# EAGLE board LIDAR_Breakout (EAGLE 9.2.0)
AUTHORS: Austin Keener; REV: 1.0; TITLE: LIDAR_BREAKOUT
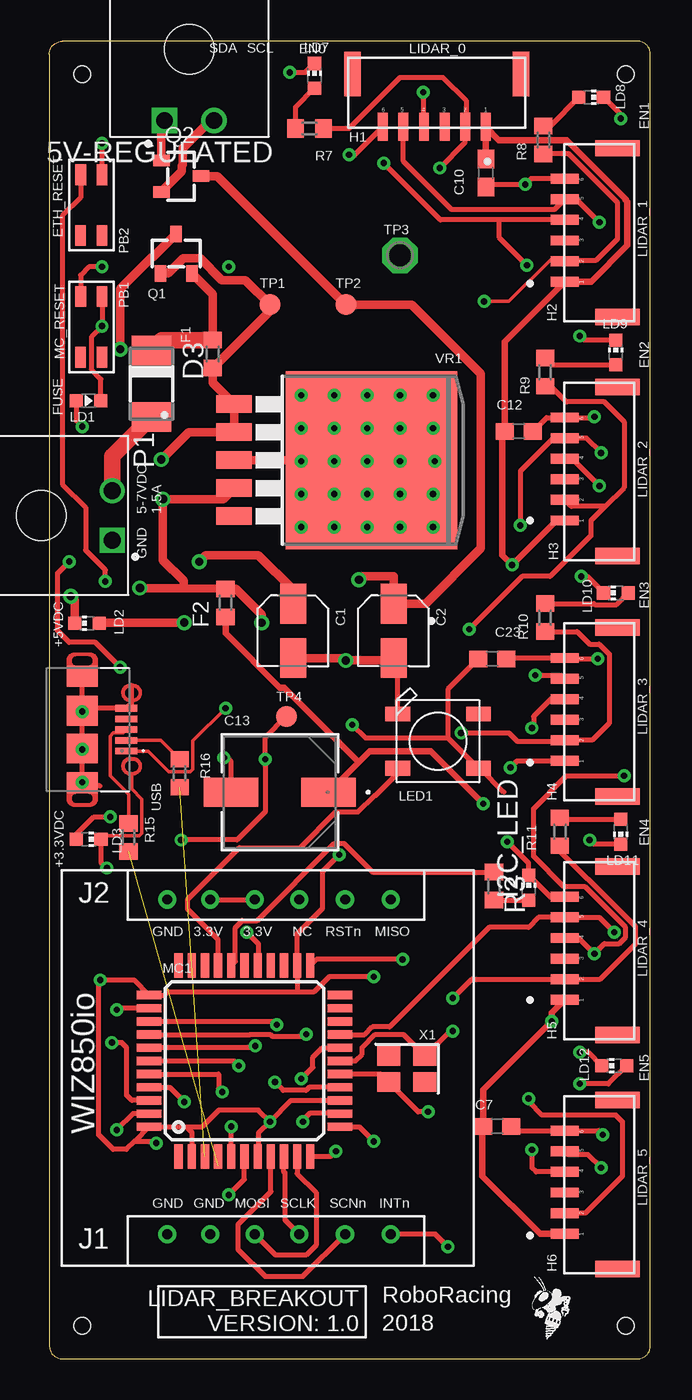
[diagram p0: board, top side]
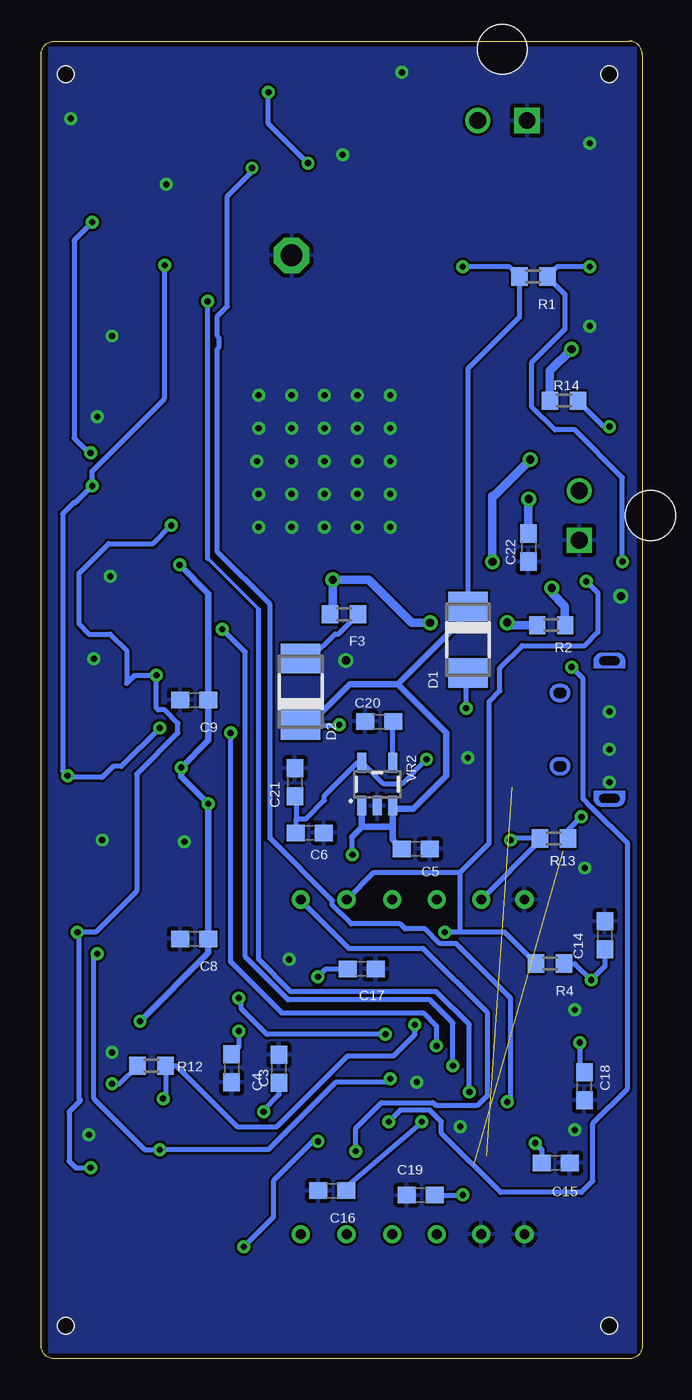
[diagram p1: board, bottom side, seen from below]

Size 36.5 x 80 mm. Coordinates in mm from the lower left corner, seen from the top.
Outline: 0.8,0 35.7,0 arc90 36.5,0.8 36.5,79.2 arc90 35.7,80 0.8,80 arc90 0,79.2 0,0.8 arc90 0.8,0
Copper layers (1*16): Top 0.0356mm / dielectric 63mil / Bottom 0.0356mm
Design rules "RJ2LayerDRU": minimum track width 6mil, minimum drill 15mil, track to track 6mil, track to pad 6mil, pad to pad 6mil, via to via 6mil, smd to smd 6mil, copper to edge 0mil, drill to drill 6mil, minimum pad ring 10mil, minimum via ring 8mil, stop-mask expansion 4mil, vias tented up to drill 0mil, thermal gap 10mil
Net classes: 0 default: width 0.203 mm; 1 diff pairs: width 0.203 mm; 2 Power: width 0.508 mm
Holes 1 mm at 35,78 2,78 2,2 35,2
tRestrict: area 6.9,14.7 to 7,15.1; area 6.8,21.1 to 7,21.4

## Footprints (pad centres in the part's own frame; a part is rotated, then mirrored left to right if it is on the bottom)
MOLEX_0436500200 = drill 1.02 square: 1 1.5,4.32 | drill 1.02: 2 -1.5,4.32 | hole 3: 0,0
CAPAE430X550N = smd 2.42 x 1.58: 1 -1.65,0; 2 1.65,0
C0603 = smd 1.1 x 1: 1 -0.85,0; 2 0.85,0
CAP_PAN_EEE_D8 = smd 3.302 x 1.778: 1 -2.959,0; 2 2.959,0
DO-214AC = smd 1.8 x 2.4: A 2.025,0; C -2.025,0
WIZ850IO = drill 0.6: 1 6.4,1.9; 2 9.02,1.9; 3 11.72,1.9; 4 14.42,1.9; 5 17.2,1.9; 6 19.98,1.9; 7 6.4,22.22; 8 9.02,22.22; 9 11.72,22.22; 10 14.42,22.22; 11 17.2,22.22; 12 19.98,22.22
F0603 = smd 1 x 1.1: 1 -0.85,0; 2 0.85,0
SM06B-GHS = smd 1 x 2.7: P$1 0.25,1; P$2 10.5,1 | smd 0.6 x 1.7: P$3 2.4,4.2; P$4 3.65,4.2; P$5 4.9,4.2; P$6 6.15,4.2; P$7 7.4,4.2; P$8 8.65,4.2
CHIP-LED0603 = smd 0.8 x 0.8: A 0,-0.75; C 0,0.75
WS2812B = smd 1.5 x 0.9: 1-VDD 2.45,-1.65; 2-DOUT 2.45,1.65; 3-GND -2.45,1.65; 4-DIN -2.45,-1.65
TQFP44 = smd 1.5 x 0.5: 1 -5.8,4; 2 -5.8,3.2; 3 -5.8,2.4; 4 -5.8,1.6; 5 -5.8,0.8; 6 -5.8,0; 7 -5.8,-0.8; 8 -5.8,-1.6; 9 -5.8,-2.4; 10 -5.8,-3.2; 11 -5.8,-4; 23 5.8,-4; 24 5.8,-3.2; 25 5.8,-2.4; 26 5.8,-1.6; 27 5.8,-0.8; 28 5.8,0; 29 5.8,0.8; 30 5.8,1.6; 31 5.8,2.4; 32 5.8,3.2; 33 5.8,4 | smd 0.5 x 1.5: 12 -4,-5.8; 13 -3.2,-5.8; 14 -2.4,-5.8; 15 -1.6,-5.8; 16 -0.8,-5.8; 17 0,-5.8; 18 0.8,-5.8; 19 1.6,-5.8; 20 2.4,-5.8; 21 3.2,-5.8; 22 4,-5.8; 34 4,5.8; 35 3.2,5.8; 36 2.4,5.8; 37 1.6,5.8; 38 0.8,5.8; 39 0,5.8; 40 -0.8,5.8; 41 -1.6,5.8; 42 -2.4,5.8; 43 -3.2,5.8; 44 -4,5.8
RESET_PB_RA = smd 1.27 x 0.66: P$1 0.9,0.7; P$3 0.9,2 | smd 1.27 x 0.635: P$2 4.6,0.7; P$4 4.6,2
SOT-23-3 = smd 0.7 x 1: 1 -0.95,-1.2; 2 0.95,-1.2; 3 0,1.2
R0603 = smd 1 x 1.1: 1 -0.85,0; 2 0.85,0
B1,27 = smd 1.27 x 1.27: TP 0,0
P1-13 = drill 1.321 pad 2.159 octagon: TP 0,0
MOLEX_47589-0001 = smd 1.35 x 0.4: 1 2.675,-1.3; 2 2.675,-0.65; 3 2.675,0; 4 2.675,0.65; 5 2.675,1.3 | smd 0.01 x 0.01: P$1 3,2.675; P$2 3,-2.675 | smd 1.9 x 1.275: P$3 0,3.237; P$6 0,-3.237 | smd 1.9 x 1.8: P$4 0,1.15; P$5 0,-1.15
TO263-5 = smd 1.067 x 2.159: 1 -3.404,-5.791; 2 -1.702,-5.791; 3 0,-5.791; 4 1.702,-5.791; 5 3.404,-5.791 | smd 10.8 x 10.41: 6 0,2.54
SOT23-5 = smd 0.55 x 1.2: 1 -0.95,-1.3; 2 0,-1.3; 3 0.95,-1.3; 4 0.95,1.3; 5 -0.95,1.3
XTAL-3.2X2.5 = smd 1.4 x 1.2: 1 -1.1,-0.8; 2 1.1,-0.8; 3 1.1,0.8; 4 -1.1,0.8

## Placement (x,y rotation side)
5V-REGULATED  [MOLEX_0436500200]  8.5,79.5 180 top
C1  10 uF  [CAPAE430X550N]  14.8,44.2 270 top
C2  10 uF  [CAPAE430X550N]  20.9,44.2 270 top
C3  22 pF  [C0603]  24.93,17.65 270 bottom
C4  22 pF  [C0603]  22.07,17.62 90 bottom
C5  1 uF  [C0603]  13.75,30.96 0 bottom
C6  2.2 uF  [C0603]  20.2,31.93 0 bottom
C7  0.1 uF  [C0603]  27.2,14.1 0 top
C8  0.1 uF  [C0603]  27.2,25.5 180 bottom
C9  0.1 uF  [C0603]  27.2,40 180 bottom
C10  0.1 uF  [C0603]  26.5,72 270 top
C12  0.1 uF  [C0603]  28.5,56.3 0 top
C13  680 uF  [CAP_PAN_EEE_D8]  14,34.4 180 top
C14  0.1 uF  [C0603]  2.27,25.73 90 bottom
C15  0.1 uF  [C0603]  5.25,11.89 0 bottom
C16  0.1 uF  [C0603]  18.83,10.21 180 bottom
C17  0.1 uF  [C0603]  17.05,23.68 0 bottom
C18  10 nF  [C0603]  3.52,16.54 270 bottom
C19  1 uF  [C0603]  13.46,9.95 180 bottom
C20  470 pF  [C0603]  15.97,38.7 180 bottom
C21  0.1 uF  [C0603]  21.09,35.01 90 bottom
C22  0.1 uF  [C0603]  6.92,49.26 270 bottom
C23  1 uF  [C0603]  26.9,42.5 0 top
D1  [DO-214AC]  10.59,43.66 270 bottom
D2  [DO-214AC]  20.75,40.5 90 bottom
D3  [DO-214AC]  6.2,59.2 270 top
ETH1  WIZ850IO  [WIZ850IO]  0.76,5.66 0 top
F1  1.5 A  [F0603]  9.93,61 270 top
F2  1A  [F0603]  10.7,45.9 90 top
F3  1A  [F0603]  18.1,45.2 180 bottom
H1  SM06B-GHS  [SM06B-GHS]  28.9,79 180 top
H2  SM06B-GHS  [SM06B-GHS]  35.5,63 90 top
H3  SM06B-GHS  [SM06B-GHS]  35.5,48.5 90 top
H4  SM06B-GHS  [SM06B-GHS]  35.5,33.9 90 top
H5  SM06B-GHS  [SM06B-GHS]  35.5,19.4 90 top
H6  SM06B-GHS  [SM06B-GHS]  35.5,5.2 90 top
I2C_LED  YELLOW  [CHIP-LED0603]  29.1,28.6 0 top
LD1  RED  [CHIP-LED0603]  2.38,58.17 270 top
LD2  GREEN  [CHIP-LED0603]  2.29,44.65 90 top
LD3  GREEN  [CHIP-LED0603]  2.39,31.55 270 top
LD7  BLUE  [CHIP-LED0603]  16.1,77.9 0 top
LD8  BLUE  [CHIP-LED0603]  32.9,76.6 270 top
LD9  BLUE  [CHIP-LED0603]  34.4,61.1 0 top
LD10  BLUE  [CHIP-LED0603]  34.4,46.5 90 top
LD11  BLUE  [CHIP-LED0603]  34.7,32 180 top
LD12  BLUE  [CHIP-LED0603]  34.3,17.8 90 top
LED1  WS2812B5050  [WS2812B]  23.6,37.5 0 top
MC1  ATMEGA32U4-AU  [TQFP44]  11.85,18.09 90 top
P1  [MOLEX_0436500200]  -0.49,51.2 270 top
PB1  ATMEGA_RESET  [RESET_PB_RA]  1.2,65.4 270 top
PB2  ETH_RESET  [RESET_PB_RA]  1.2,72.8 270 top
Q1  [SOT-23-3]  7.7,67.1 0 top
Q2  [SOT-23-3]  8,71.8 270 top
R1  10 kΩ  [R0603]  6.62,65.71 0 bottom
R2  1 kΩ  [R0603]  5.53,44.55 0 bottom
R3  1 kΩ  [R0603]  27,28.7 270 top
R4  10 kΩ  [R0603]  5.6,24 180 bottom
R7  1 kΩ  [R0603]  15.8,74.7 180 top
R8  1 kΩ  [R0603]  30,74 90 top
R9  1 kΩ  [R0603]  30.1,59.9 90 top
R10  1 kΩ  [R0603]  30.1,45 90 top
R11  1 kΩ  [R0603]  31,32 90 top
R12  1 kΩ  [R0603]  29.8,17.8 180 bottom
R13  1 kΩ  [R0603]  5.37,31.59 180 bottom
R14  1 kΩ  [R0603]  4.76,58.18 0 bottom
R15  22 Ω  [R0603]  4.81,31.66 90 top
R16  22 Ω  [R0603]  7.91,35.55 90 top
TP1  PTR1B1,27  [B1,27]  13.4,64 0 top
TP2  PTR1B1,27  [B1,27]  18,64 0 top
TP3  PTR1PAD1-13  [P1-13]  21.3,67 0 top
TP4  PTR1B1,27  [B1,27]  14.4,39 0 top
U$3  ROBOBUZZ0.2X  [ROBOBUZZ_0.2X]  30.2,1.2 0 top
USB  [MOLEX_47589-0001]  2,38.2 0 top
VR1  LP3852EMP-5.0  [TO263-5]  17.01,54.56 270 top
VR2  MIC5219 3.3V  [SOT23-5]  16.1,34.89 0 bottom
X1  [XTAL-3.2X2.5]  21.7,17.6 180 top

## Library data of the parts
5V-REGULATED P1 = 0436500200; DESCRIPTION: Conn Power HDR 2 POS 3mm Solder RA Thru-Hole 2 Terminal 1 Port Micro-Fit 3.0Ã¢âÂ¢ Tray; MF: Molex, LLC; MP: 0436500200; PACKAGE: None
C1 C2 = EEE-1CA100SR; DESCRIPTION: Capacitor Alum Elec, 10uf, 16v, 20%, Scapacitor Alum Elec, 10uf, 16v, 20%, Smd, Full Reel; DIGI-KEY_PART_NUMBER: PCE3878CT-ND; DIGI-KEY_PURCHASE_URL: https://www.digikey.com/product-detail/en/panasonic-electronic-components/EEE-1CA100SR/PCE3878CT-ND/766254?utm_source=snapeda&utm_medium=aggregator&utm_campaign=symbol; MF: Panasonic; MP: EEE-1CA100SR; PACKAGE: Radial Panasonic
C3-C10 C12 C14-C22 = resistor
C13 = 680uF_Elect_Cap; MANUFACTURER_PART_NUMBER: EEEFTJ681XAP; VENDOR: Panasonic
C23 = rcl; SPICEPREFIX: C
D1-D3 = RoboJackets-Diodes
ETH1 = WIZ850io
F1-F3 = RoboJackets-Fuses
H1-H6 = RoboJackets-Connectors
I2C_LED LD2 LD3 LD7-LD12 = led
LD1 = RoboJackets-LEDs; DIGIKEY: 160-1447-1-ND; MPN: LTST-C191KRKT
LED1 MC1 = adafruit
PB1 PB2 = RoboJackets-Switches
Q1 Q2 = RoboJackets-Discrete
R1-R4 R7-R16 = rcl; SPICEPREFIX: R
TP1-TP4 = testpad
U$3 = RoboJackets-Aesthetics
USB = 47589-0001; DESCRIPTION: Stainless Steel Extractor for Camera Socket, 6.5x6.5 Type, Lead free; MF: Molex; MP: 47589-0001; PACKAGE: None
VR1 = linear
VR2 = SparkFun-IC-Power; PROD_ID: VREG-09872
X1 = RoboJackets-FreqGen

## Nets
+3.3V: C6.1 C21.1 ETH1.8 ETH1.9 R13.2 TP4.TP VR2.5
AREF: C18.1 MC1.42
GND: 5V-REGULATED.1 C1.2 C2.2 C3.2 C4.2 C5.2 C6.2 C7.2 C8.2 C9.2 C10.2 C12.2 C13.2 C14.2 C15.2 C16.2 C17.2 C18.2 C19.2 C20.2 C21.2 C22.2 C23.2 ETH1.1 ETH1.2 ETH1.7 H1.P$8 H2.P$8 H3.P$8 H4.P$8 H5.P$8 H6.P$8 I2C_LED.C LD1.C LD2.C LD3.C LD7.C LD8.C LD9.C LD10.C LD11.C LD12.C LED1.3-GND MC1.5 MC1.15 MC1.23 MC1.35 MC1.43 P1.1 PB1.P$3 PB2.P$3 Q2.1 TP3.TP USB.5 USB.P$1 USB.P$2 USB.P$3 USB.P$4 USB.P$5 USB.P$6 VR1.3 VR1.6 VR2.2
I2C_ACTIVITY: MC1.29 R3.1
INTN_ETH: ETH1.6 MC1.12
LDR0_EN: H1.P$4 MC1.41 R7.1
LDR0_LED: LD7.A R7.2
LDR1_EN: H2.P$4 MC1.40 R8.1
LDR1_LED: LD8.A R8.2
LDR2_EN: H3.P$4 MC1.39 R9.1
LDR2_LED: LD9.A R9.2
LDR3_EN: H4.P$4 MC1.38 R10.1
LDR3_LED: LD10.A R10.2
LDR4_EN: H5.P$4 MC1.37 R11.1
LDR4_LED: LD11.A R11.2
LDR5_EN: H6.P$4 MC1.36 R12.1
LDR5_LED: LD12.A R12.2
MISO_ETH: ETH1.12 MC1.11
MOSI_ETH: ETH1.3 MC1.10
N$1: D1.A USB.1
N$2: D3.A P1.2
N$3: LD2.A R2.1
N$4: Q1.3 R14.1
N$5: LD3.A R13.1
N$6: LD1.A R14.2
N$7: D2.A F3.1
N$8: I2C_LED.A R3.2
N$9: 5V-REGULATED.2 Q2.2
N$14: R16.2 USB.2
N$23: R15.2 USB.3
N$31: C20.1 VR2.4
RST_ETH: ETH1.11 MC1.27 PB2.P$1 R4.2
RST_MC: MC1.13 PB1.P$1 R1.2
SCL_LIDAR: H1.P$6 H2.P$6 H3.P$6 H4.P$6 H5.P$6 H6.P$6 MC1.18
SCLK_ETH: ETH1.4 MC1.9
SCNN_ETH: ETH1.5 MC1.8
SDA_LIDAR: H1.P$7 H2.P$7 H3.P$7 H4.P$7 H5.P$7 H6.P$7 MC1.19
STATUS_PWM: LED1.4-DIN MC1.30
UCAP: C19.1 MC1.6
USB_N [diff pairs]: MC1.3 R16.1
USB_P [diff pairs]: MC1.4 R15.1
UVCC: D3.C F1.1 Q1.2
VCC_1: C7.1 C8.1 C9.1 C10.1 C12.1 C13.1 F2.1 H1.P$3 H2.P$3 H3.P$3 H4.P$3 H5.P$3 H6.P$3
VCC_2: C5.1 C14.1 C15.1 C16.1 C17.1 C23.1 D1.C D2.C LED1.1-VDD MC1.2 MC1.7 MC1.14 MC1.24 MC1.34 MC1.44 R1.1 R4.1 VR2.1 VR2.3
VIN: C1.1 F1.2 Q1.1 TP1.TP VR1.1 VR1.2
VOUT: C2.1 C22.1 F2.2 F3.2 Q2.3 R2.2 TP2.TP VR1.4
XTAL1: C3.1 MC1.17 X1.1
XTAL2: C4.1 MC1.16 X1.3

## Tracks (layer width: path | path; a pad name or v marks a point on that pad's centre or on a via)
+3.3V  (via drill 0.38)
  Top 0.305: TP4.TP 13.11,37.71 v13.11,36.41 13.11,33.21 11.4,31.5 v8,31.5 | ETH1.8 ETH1.9
  Bottom 0.305: v8,31.5 7.91,31.59 R13.2 6.22,31.44 ETH1.8 | v13.11,36.41 14.61,34.9 15.7,34.9 16.99,36.19 VR2.5 17.31,36.19 19.3,34.2 19.3,33.9 20.4,32.8 21,32.8 | C6.1 21,31.98 21,32.8 | C21.1 21,34.07 21,32.8
AREF  (via drill 0.38)
  Top 0.305: MC1.42 5.01,15.69 4.7,16 4.7,18.9 4.4,19.2 v3.8,19.2
  Bottom 0.305: v3.8,19.2 3.8,17.67 C18.1
GND  (via drill 0.38, 0.5)
  Top 0.203: VR1.3 11.09,54.7 | USB.P$2 5,34.6 5.61,33.99 5.61,31.91 5.46,31.76 3.35,31.76 LD3.C
  Top 0.305: LD12.C 32.75,18.6 v32.2,18.6 | MC1.35 4.19,21.29 v4.1,21.2 | MC1.43 5.09,14.89 v4.1,13.9 | v21.45,24.25 16.21,24.25 MC1.23 | MC1.5 v11.05,14.1 | C1.2 14.95,42.4 | C2.2 20.75,42.4 21.15,42 LED1.3-GND | H2.P$8 29.25,71.65 v28.9,71.3 26.65,71.3 C10.2 | 31.35,42.5 H4.P$8 27.8,42.55 C23.2 | 31.35,42.5 v33.3,42.5 | v33.6,13.6 33.35,13.85 H6.P$8 28.3,13.85 C7.2 | LD10.C 32.65,47.5 v32.3,47.5 | v33.1,57.2 33.05,57.15 H3.P$8 30.2,57.15 C12.2 | PB1.P$3 v3.2,62.7 2.58,62.08 2.58,60.04 3.13,59.49 LD1.C | PB2.P$3 v3.2,73.8 | H1.P$8 18.55,73.1 v18.2,73.1 | LD3.C 3.14,30.16 v3.5,29.8 | 2,39.6 USB.P$4 v2,39.3 USB.P$5 v2,37 v2,35 USB.P$6 2.18,34.78 3.08,34.78 | 2,39.6 USB.P$3 | C13.2 11.04,36.26 10.8,36.5 v10.6,36.5 | VR1.6 19.36,54.56 v19.3,54.5 | MC1.15 15.77,16.49 15.59,16.3 14.2,16.3 v13.7,16.8 | 2,39.6 2.1,39.5 USB.5 5,39.83 USB.P$1 | 30.6,42.5 31.35,42.5 | v14.6,78.1 15.55,78.1 LD7.C | LD8.C 34.7,75.55 v34.7,75.3 | LD9.C 32.45,61.85 v32.2,62.1 | LD11.C 33.05,31.25 v32.8,31.5 | H5.P$8 30.4,28.05 I2C_LED.C 29.1,30.1 v27.8,31.4
  Top 0.508: 20.75,42.4 v18,42.4 17.85,42.55 C1.2 | LD2.C 1.54,46.06 v1.3,46.3 | VR1.3 VR1.6 | Q2.1 6.8,74.98
  Top 1.016: 6.8,74.98 5V-REGULATED.1
  other vias: 15.3,58.5 17.3,58.5 19.3,58.5 21.3,58.5 15.3,56.5 15.3,54.5 15.3,52.5 15.3,50.5 17.3,50.5 17.3,52.5 17.3,54.5 21.3,54.5 23.4,54.5 19.3,52.5 21.3,52.5 23.3,52.5 17.3,56.5 19.3,56.5 21.3,56.5 23.3,56.5 23.3,58.5 19.3,50.5 21.3,50.5 23.3,50.5
  pour Bottom: 0.4,0.4 0.4,79.6 36,79.6 36,0.4
I2C_ACTIVITY
  Top 0.305: MC1.29 11.29,24.13 11.29,26.18 11.71,26.6 12.61,26.6 17.31,31.3 17.89,31.3 19.64,29.55 R3.1
INTN_ETH  (via drill 0.38)
  Top 0.305: MC1.12 18.81,14.09 v19.7,13.2 | v24.2,6.8 23.44,7.56 ETH1.6
  Bottom 0.305: v19.7,13.2 20,13.2 22.4,10.8 22.4,8.6 v24.2,6.8
LDR0_EN  (via drill 0.38)
  Top 0.305: MC1.41 7.31,16.49 v8.2,15.6 | R7.1 18.2,74.7 21.3,77.8 23.9,77.8 25.3,76.4 25.3,74.75 H1.P$4 25.25,73.85 v23.7,72.3
  Bottom 0.305: v8.2,15.6 8,15.8 8,21.9 11.3,25.2 12.29,25.2 13.19,26.1 14.4,26.1 14.7,26.4 17.69,26.4 18.82,27.53 18.82,27.82 22.6,31.6 22.6,45.8 25.8,49 25.8,61.31 25.7,61.41 25.7,61.99 25.8,62.09 25.8,63.3 25.2,63.9 25.2,70.6 23.7,72.1 v23.7,72.3
LDR0_LED
  Top 0.305: R7.2 14.95,76 LD7.A
LDR1_EN  (via drill 0.38)
  Top 0.203: v26.4,64.2 27.9,64.2 30.4,66.7 31.35,66.7
  Top 0.305: MC1.40 10.29,17.29 10.29,16.41 v10.5,16.2 | H2.P$4 31.35,66.7 33.2,66.7 34.5,68 34.5,70.2 31.55,73.15 R8.1
  Bottom 0.203: 23.3,45.5 26.4,48.6
  Bottom 0.305: v10.5,16.2 10.5,20.3 12.5,22.3 21.35,22.3 23.3,24.25 23.3,45.5 | 26.4,48.6 v26.4,64.2
LDR1_LED
  Top 0.305: LD8.A 30.4,74.85 R8.2
LDR2_EN  (via drill 0.38)
  Top 0.305: v11.5,17.8 11.21,18.09 MC1.39 | v25.5,44.3 28.7,47.5 30.4,47.5 32.9,50 32.9,50.9 33.75,51.75 | 33.75,51.75 31.7,51.75 H3.P$4 | 33.75,51.75 34.9,52.9 34.9,56.9 33.7,58.1 31.4,58.1 30.45,59.05 R9.1
  Bottom 0.305: v11.5,17.8 11.5,20.4 12.9,21.8 21.5,21.8 24.1,24.4 24.1,42.9 v25.5,44.3
LDR2_LED
  Top 0.305: R9.2 30.5,60.35 LD9.A
LDR3_EN  (via drill 0.38)
  Top 0.305: v12.5,19 12.39,18.89 MC1.38 | R10.1 32.05,44.15 32.8,43.4 33.39,43.4 34,42.79 34,38.6 33,37.6 31.35,37.6 H4.P$4 31.25,37.5 28.4,37.5 27.9,38 v25,38
  Bottom 0.305: v25,38 25,24.1 21.9,21 13.3,21 12.5,20.2 v12.5,19
LDR3_LED
  Top 0.305: R10.2 33.07,45.85 33.12,45.8 34.45,45.8 LD10.A
LDR4_EN  (via drill 0.38)
  Top 0.305: v24.5,21.9 25.65,23.05 H5.P$4 33.45,23.05 35.6,25.2 35.6,26.23 32.72,29.11 32.7,29.11 31,30.81 R11.1 | MC1.37 12.2,19.69 12.21,19.7 13.41,19.7 13.53,19.59 15.49,19.59 v15.6,19.7
  Bottom 0.305: v15.6,19.7 22.8,19.7 24.35,21.25 24.35,21.75 v24.5,21.9
LDR4_LED
  Top 0.305: R11.2 31.1,32.75 LD11.A
LDR5_EN  (via drill 0.38)
  Top 0.305: v13.81,20.29 13.61,20.49 MC1.36 | H6.P$4 32.55,8.85 34.8,11.1 34.8,14.4 34.4,14.8 29.9,14.8 29.1,15.6 v29.1,15.8
  Bottom 0.305: v29.1,15.8 28.95,15.95 R12.1 28.3,17.8 24.6,14.1 22.2,14.1 17.9,18.4 15.1,18.4 13.81,19.69 v13.81,20.29
LDR5_LED  (via drill 0.38)
  Top 0.305: v32.2,16.7 33.95,16.7 LD12.A
  Bottom 0.305: R12.2 31.75,16.7 v32.2,16.7
MISO_ETH  (via drill 0.38)
  Top 0.305: MC1.11 17.09,12.29 v17.4,12.6
  Bottom 0.305: v17.4,12.6 17.4,14 15.84,15.56 12.71,15.56 12.55,15.4 10,15.4 9.4,16 9.4,21 13.3,24.9 17.8,24.9 20.74,27.84 ETH1.12
MOSI_ETH
  Top 0.305: ETH1.3 13.74,6.3 15.6,6.3 16.2,6.9 16.2,10.1 15.05,11.25 MC1.10
N$1  (via drill 0.38)
  Top 0.203: v10.7,39.5 8.71,37.51 8.71,35.8 8.56,35.65 7.25,35.65 6,36.9 USB.1
  Bottom 0.305: v10.7,39.5 10.7,41.52 D1.A
N$2
  Top 1.016: P1.2 3.83,54.8 D3.A
N$3  (via drill 0.5)
  Top 0.508: v8.2,44.7 3.09,44.7 LD2.A
  Bottom 0.508: R2.1 8.05,44.55 v8.2,44.7
N$4  (via drill 0.5)
  Top 0.508: v4.3,61.3 4.3,64.97 6.21,66.87 6.27,66.87 Q1.3
  Bottom 0.508: v4.3,61.3 5.61,59.99 R14.1
N$5  (via drill 0.38)
  Top 0.305: LD3.A 1.64,31.84 2.7,32.9 v3.7,32.9
  Bottom 0.305: v3.7,32.9 4.52,32.08 R13.1
N$6  (via drill 0.38)
  Top 0.305: LD1.A 1.63,56.97 v2,56.6
  Bottom 0.305: v2,56.6 2.33,56.6 R14.2
N$7
  Bottom 0.305: D2.A 20.15,42.52 18.68,44 18.45,44 F3.1
N$8
  Top 0.305: R3.2 I2C_LED.A
N$9
  Top 0.508: Q2.2 8.04,72.09 8.04,72.42 8.1,72.48 8.1,73.5 9.78,75.18
  Top 1.016: 9.78,75.18 5V-REGULATED.2
N$14
  Top 0.203: R16.2 6.76,37.55 USB.2
N$23
  Top 0.203: R15.2 4.81,34.29 3.7,35.4 3.7,37.81 3.9,38 4.48,38 USB.3
N$31
  Bottom 0.305: VR2.4 15.15,38.67 C20.1
RST_ETH  (via drill 0.38)
  Top 0.305: v12,25.9 12.7,25.2 12.7,23.94 MC1.27 | PB2.P$1 1.9,70.5 0.8,69.4 0.8,53.1 2.2,51.7 2.2,49.1 3.4,47.9 v3.4,47.2
  Bottom 0.305: R4.2 8.35,25.9 11.1,25.9 | 11.1,25.9 v12,25.9 | v3.4,47.2 2.7,46.5 2.7,44.1 3.5,43.3 7.3,43.3 8.65,41.95 8.65,40.55 9.3,39.9 9.3,31.3 11.1,29.5 | ETH1.11 16.34,29.5 11.1,29.5 | 11.1,29.5 11.1,25.9
RST_MC  (via drill 0.38)
  Top 0.305: v3.2,66.3 2.4,66.3 1.9,65.8 PB1.P$1 | MC1.13 17.64,14.9 15.8,14.9 15.4,14.5 v15.4,14.4 | v1.21,48.41 0.5,47.7 0.5,44.2 1.2,43.5 2.8,43.5 v4.3,42
  Bottom 0.305: v3.2,66.3 5.18,66.3 R1.2 4.7,64.64 4.7,62.5 6.7,60.5 6.7,57.79 5.31,56.4 4.1,56.4 1.21,53.51 v1.21,48.41 | v4.3,42 3.6,41.3 3.6,34 3.07,33.47 3.06,33.46 0.9,31.3 0.9,16.4 3,14.3 3,10.8 3.7,10.1 8.6,10.1 12.2,13.7 12.2,14.4 12.9,15.1 14.7,15.1 v15.4,14.4
SCL_LIDAR  (via drill 0.38)
  Top 0.305: v20.3,72.6 23.75,69.15 27.3,69.15 | v22.7,76.9 22.7,74.85 H1.P$6 | v29.3,38.3 29.4,38.4 29.4,39 30.45,40.05 H4.P$6 | v15.3,17 16,17.7 16,18.3 16.59,18.89 MC1.18 | H6.P$6 29.55,11.35 29.3,11.6 v29.3,12.7 | H2.P$6 27.3,69.15 | 27.3,69.15 27.3,68.1 v29,66.4 | v33.4,53 31.75,54.65 H3.P$6 | H5.P$6 32.15,25.55 v33.1,24.6 33.7,25.2 34.59,25.2 35,25.61 35,26.19 32.53,28.66 31.25,28.66 29.4,30.5 29.4,33.4 31.4,35.4 v34.9,35.4
  Bottom 0.305: v20.3,72.6 22.7,75 v22.7,76.9 | v15.3,17 15.3,16.8 18.6,16.8 22.7,12.7 v29.3,12.7 30.2,12.7 33.3,15.8 33.3,24.4 v33.1,24.6 | v29,66.4 29,58.3 33.4,53.9 v33.4,53 34.4,52 34.5,52 35.2,51.3 35.2,35.7 v34.9,35.4 34.8,35.3 32.8,35.3 32.12,35.98 31.62,35.98 v29.3,38.3
SCLK_ETH
  Top 0.305: MC1.9 14.25,11.35 14.3,11.3 14.3,8.44 ETH1.4
SCNN_ETH
  Top 0.305: MC1.8 13.45,10.15 11.45,8.15 11.45,6.65 13.1,5 15.39,5 ETH1.5
SDA_LIDAR  (via drill 0.38)
  Top 0.305: v29.5,41.5 31.1,41.5 H4.P$7 | 21.5,75.4 H1.P$7 21.5,72.7 24.4,69.8 30.7,69.8 H2.P$7 32,70.4 v33.4,69 | v33.5,11.6 32.7,12.4 31.5,12.4 H6.P$7 | v28.6,50.6 28.6,53.9 30.6,55.9 H3.P$7 32.6,55.9 v33.5,55 | MC1.19 19.14,19.69 19.61,20.16 20.66,20.16 26.7,26.2 29.1,26.2 29.7,26.8 H5.P$7 33.4,26.8 v34.3,25.9
  Bottom 0.305: v33.5,11.6 34.4,11.6 34.8,12 34.8,15 34.1,15.7 34.2,15.8 34.2,25.8 | v33.4,69 34.5,67.9 34.5,55.9 33.6,55 v33.5,55 | v28.6,50.6 29.7,49.5 32.4,49.5 34.2,47.7 34.2,44.6 33.6,44 32.3,44 31.31,43.01 31.31,41.01 30.83,41.5 v29.5,41.5 29.5,39.5 29.4,39.4 29,39.4 28.2,38.6 28.2,38 30.7,35.5 30.7,28.4 33.2,25.9 34.1,25.9 34.2,25.8 | 34.2,25.8 v34.3,25.9
STATUS_PWM
  Top 0.305: MC1.30 10.25,25.45 8.4,27.3 8.4,27.9 11.54,31.04 15.24,31.04 17.41,33.21 18.74,33.21 19.73,34.2 19.8,34.2 21.15,35.55 LED1.4-DIN
UCAP  (via drill 0.38)
  Top 0.305: v10.9,9.95 11.85,10.9 MC1.6
  Bottom 0.305: C19.1 v10.9,9.95
USB_N  (1 unrouted)
USB_P  (1 unrouted)
  Top 0.203: 4.82,30.83 R15.1 | 10.25,11.73 MC1.4
UVCC
  Top 0.508: F1.1 9.93,64.62 Q1.2
  Top 1.016: F1.1 6.83,61.85 D3.C
VCC_1  (via drill 0.38)
  Top 0.305: v28,35.9 28.4,36.3 H4.P$3 | 26.3,14.05 C7.1 | 30.8,50.9 H3.P$3 | 27.5,56.15 C12.1
  Top 0.406: v26.35,33.7 23.15,36.9 19.46,36.9 18.78,36.22 | C13.1 18.78,36.22 | 18.78,36.22 14.25,40.75 14,40.75 10.7,44.05 F2.1 | H5.P$3 30.5,21 v30.5,20.5 26.35,16.35 C7.1 | H6.P$3 29.8,7.6 26.3,11.1 26.3,14.05 | 30.8,50.9 v28.1,48.2 27.5,48.8 27.5,56.15 | C12.1 27.65,61.75 H2.P$3 32.9,65.4 35.1,67.6 35.1,70.25 35.01,70.34 35.01,70.41 31.42,74 27.3,74 H1.P$3 C10.1
  Bottom 0.406: v30.5,20.5 26.35,24.65 C8.1 v26.35,33.7 28,35.35 v28,35.9 26.35,37.55 C9.1 26.35,46.45 v28.1,48.2
VCC_2  (via drill 0.38)
  Top 0.305: 8.31,14.09 MC1.44 5.18,13.22 | 8.31,14.09 8.65,13.75 MC1.2 | MC1.7 12.7,12.34 12.7,13.7 v13.4,14.4 | v13.4,14.4 14.69,15.69 MC1.14 | v19.7,23.2 17,23.2 16.1,22.3 15.1,22.3 | 8.31,14.09 9.29,14.09 10.3,15.1 12.7,15.1 v13.4,14.4 | 15.1,22.3 15.05,22.35 MC1.24 15.05,25.8 16.6,27.35 16.6,29.6 v17.6,30.6 | 15.1,22.3 7.2,22.3 6.99,22.09 MC1.34 5.13,23 v3.1,23 3,22.9 3,13.6 3.88,12.72 4.68,12.72 5.18,13.22 | v18.4,38.5 19.2,37.7 24.2,37.7 | 24.2,37.7 LED1.1-VDD 26.15,35.85 27.6,34.4 | 5.18,13.22 6.38,13.22 v6.5,13.1 | C23.1 24.2,40.65 24.2,37.7
  Bottom 0.305: 20.25,38.48 D2.C 18.43,38.48 v18.4,38.5 | C16.1 17.93,10.49 13.61,14.19 v13.4,14.4 | v19.7,23.2 19.22,23.68 C17.1 | v10.9,66.3 8.06,66.3 R1.1 7.47,63.23 10.59,60.11 D1.C 10.59,45.21 | 17.05,32.35 17,32.3 | R4.1 4.1,24 v3.1,23 2.27,23.83 C14.1 | v17.6,30.6 17.6,31.7 | 14.96,33.4 VR2.3 | v6.5,13.1 6.11,12.71 C15.1
  Bottom 0.406: 20.25,38.48 17.76,40.96 14.84,40.96 | VR2.3 15.15,32.3 | 15.15,32.3 15.15,31.51 C5.1 | VR2.1 17.05,32.35 | 15.15,32.3 17,32.3 17.6,31.7 | 14.84,40.96 10.59,45.21 | 14.84,40.96 11.9,38.02 11.9,35.4 13.9,33.4 14.96,33.4
VIN  (via drill 0.5)
  Top 0.508: v6.8,54.6 8.47,56.27 VR1.2 VR1.1 9.93,59.26 F1.2 13.4,63.62 TP1.TP 11.9,65.5 10.47,65.5 9.17,66.81 8.13,66.81 7.22,65.9 Q1.1 | v9.1,48.4 9.5,48.8 12.7,48.8 14.8,46.7 C1.1
  Bottom 0.508: v6.8,54.6 9,52.4 9.1,52.4 v9.1,48.4
VOUT  (via drill 0.5)
  Top 0.508: VR1.4 10.56,52.2 v6.9,52.2 6.9,48.5 8.15,47.25 8.15,46.8 | 8.15,46.8 F2.2 11.32,46.75 12.89,45.19 v12.89,44.69 | v5.5,46.8 8.15,46.8 | v18.8,47.3 19,47.5 20.9,47.5 C2.1 22.85,45.85 26.2,49.2 26.2,59.8 22,64 TP2.TP 10.2,71.8 Q2.3
  Bottom 0.305: R2.2 4.7,44.57
  Bottom 0.508: C22.1 6.92,52.18 v6.9,52.2 | 4.7,44.57 4.7,45.7 5.5,46.5 v5.5,46.8 | F3.2 18.8,45.35 v18.8,47.3 16.6,47.3 13.99,44.69 v12.89,44.69
XTAL1  (via drill 0.38)
  Top 0.305: v24.5,19.9 24.3,19.9 X1.1 21.5,19.7 19.8,19.7 19,18.9 19,18.5 18.59,18.09 MC1.17
  Bottom 0.305: v24.5,19.9 24.5,18.93 C3.1
XTAL2  (via drill 0.38)
  Top 0.305: MC1.16 20.11,17.29 X1.3 22.4,15 v23,15
  Bottom 0.305: v23,15 23,15.1 22.07,16.03 C4.1

## Text on the board
tPlace: EN0 | SDA | SCL | LIDAR_0 | EN1 | ETH_RESET | LIDAR_1 | EN2 | MC_RESET | FUSE | LIDAR_2 | 5-7VDC | 1.5A | GND | EN3 | +5VDC | LIDAR_3 | EN4 | +3.3VDC | LIDAR_4 | EN5 | LIDAR_5 | LIDAR_BREAKOUT / VERSION: 1.0 | RoboRacing | 2018